# Altium PCB 主控板.PcbDoc
Units mil, origin at the board's own origin, x right, y up, seen from the top; angles counter-clockwise.
Board outline 1975.03 x 2810.37 mil, 2 copper layers (Top Layer, Bottom Layer); 77 components, 89 nets, 379 pads, 104 vias.
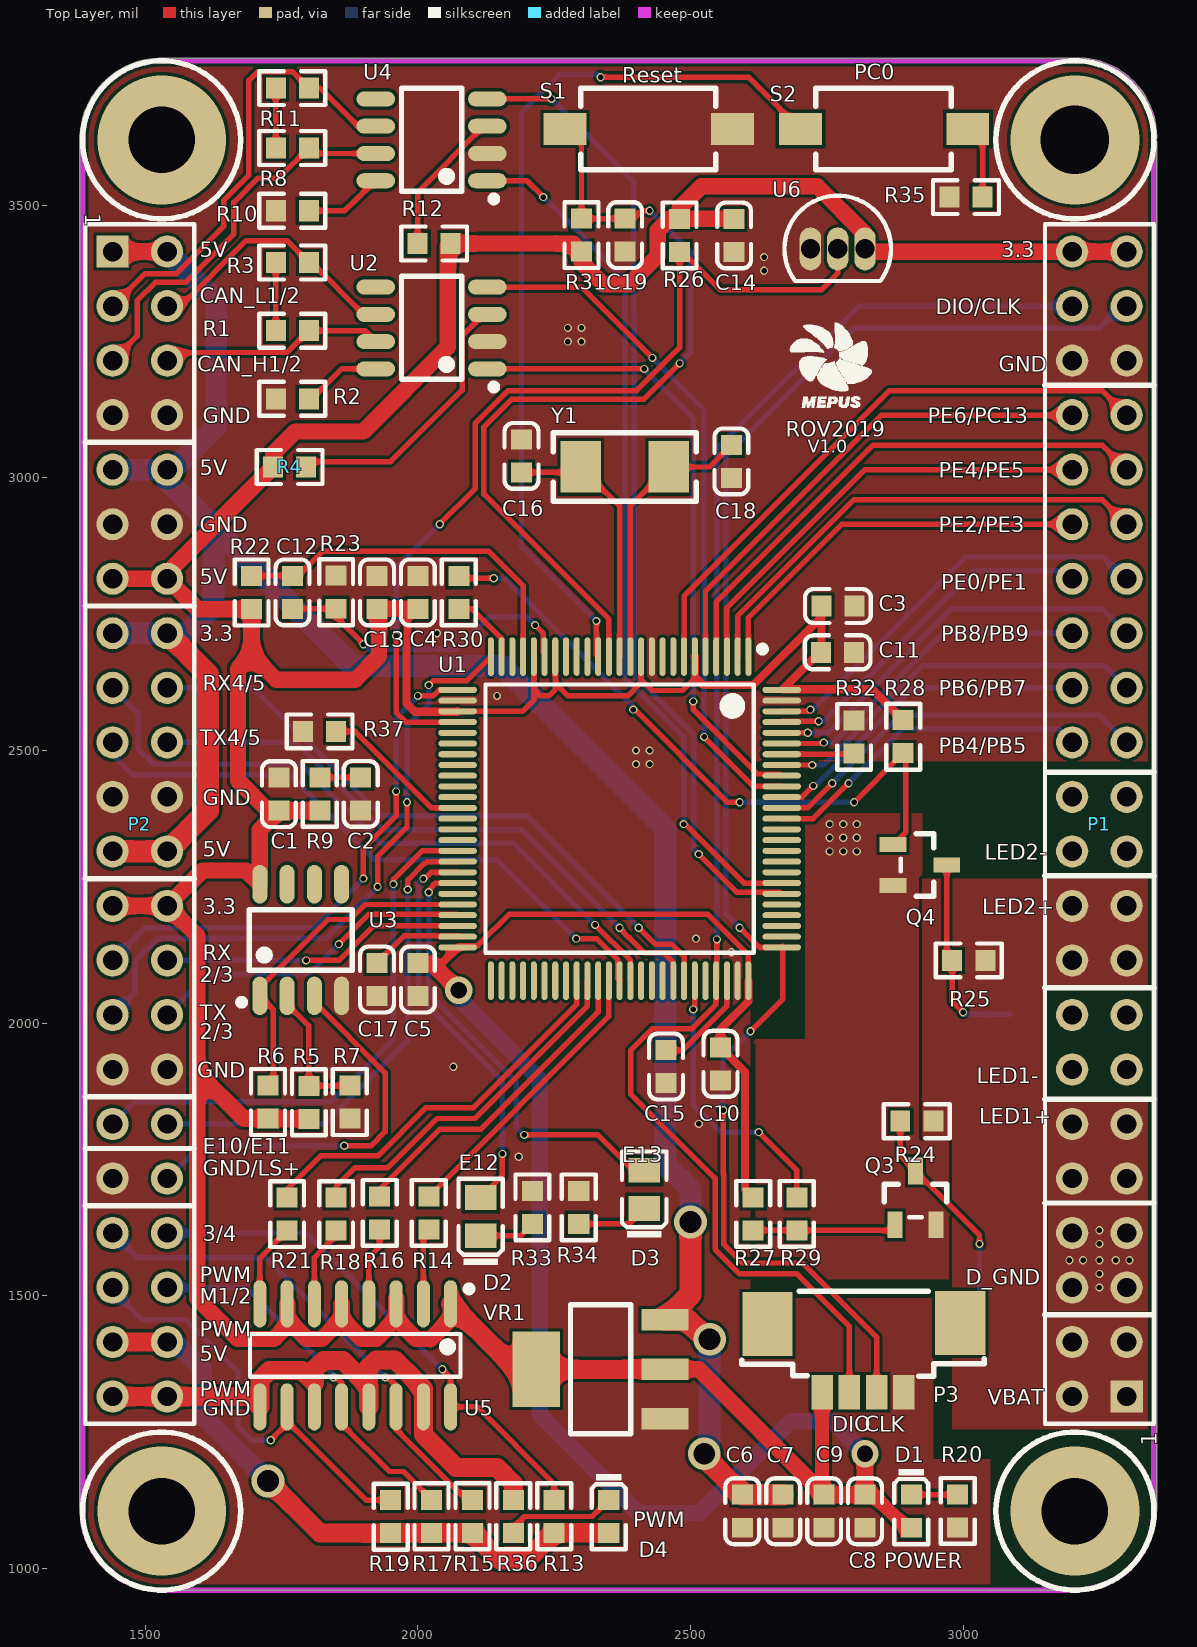
[diagram p0: Top Layer view]
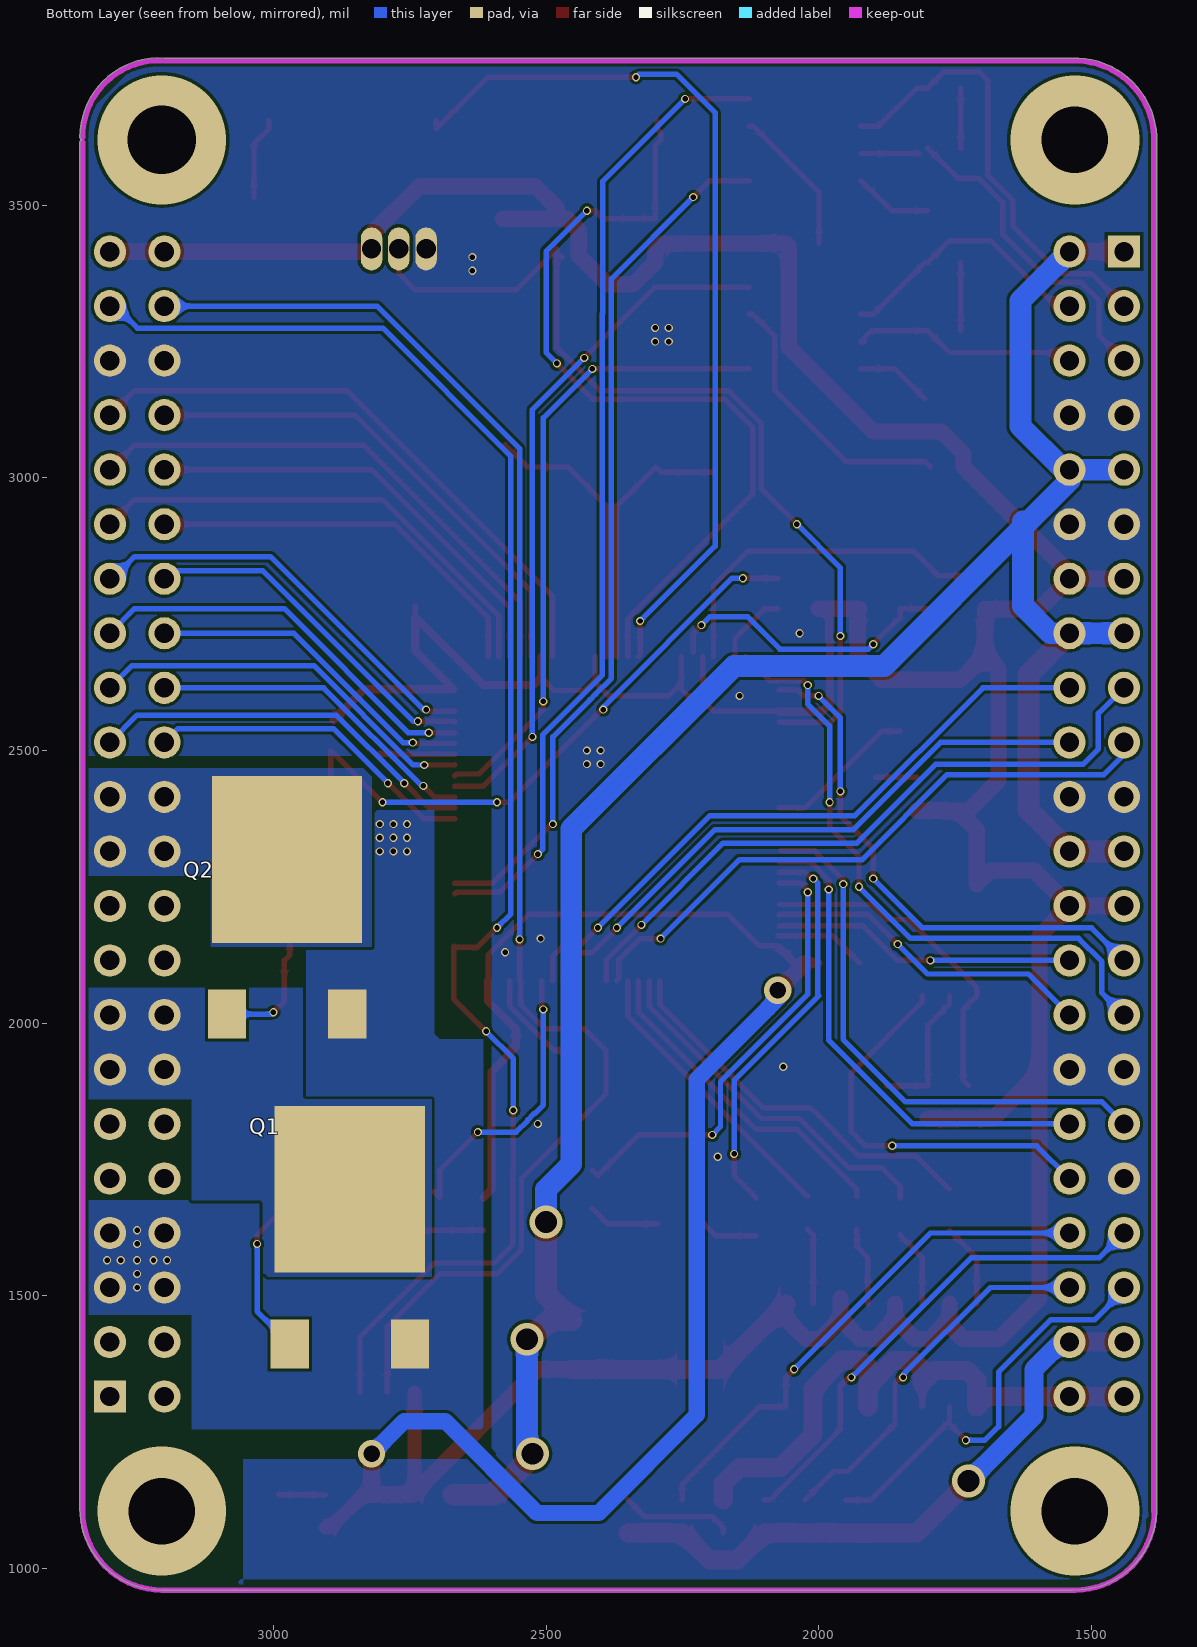
[diagram p1: Bottom Layer view, seen from below]
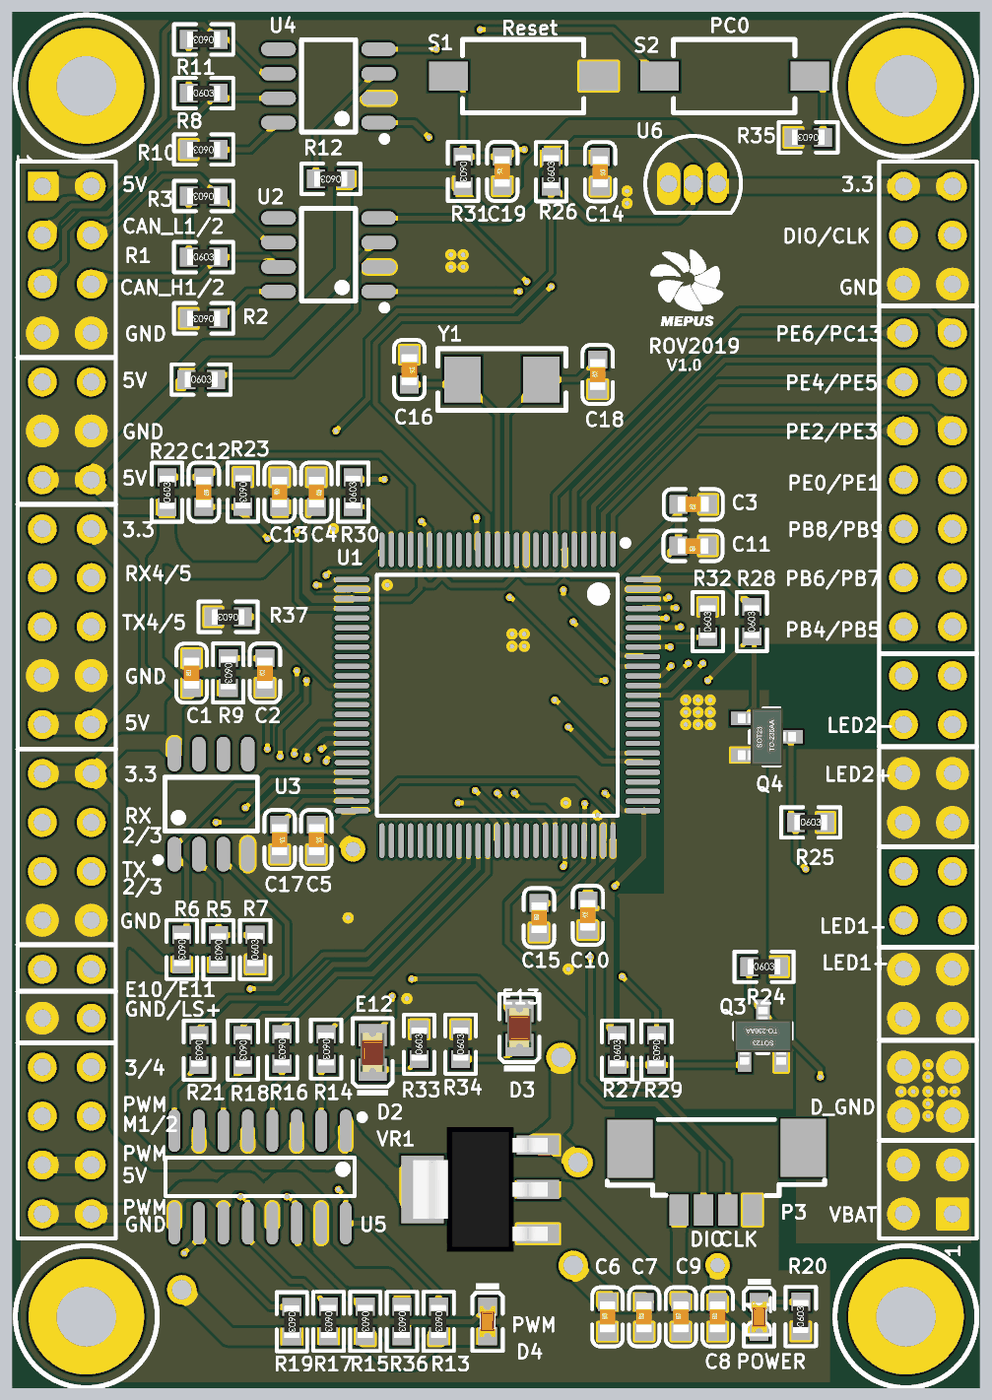
[diagram p2: 3D render of the assembled board from above, using the file's embedded part models]

## Layer stack, top to bottom
Top Solder: solder mask 0.4, Solder Resist, Dk 3.5
Top Layer: signal copper 1.4
Dielectric 1: dielectric 12.6, FR-4, Dk 4.8
Bottom Layer: signal copper 1.4
Bottom Solder: solder mask 0.4, Solder Resist, Dk 3.5

## Board outline
1380.04,1114.23 cw(c1385,1115) 1379.98,1115 1379.98,3625 cw(c1385,3625) 1380.11,3626.11 cw(c1530,3620) 1523.89,3769.89 cw(c1525,3765) 1525,3770.01 3199.47,3770.01 cw(c3209.64,3625) 3355.01,3625 cw(c3350,3625) 3351.57,3620.24 cw(c3350,3615.47) 3355.01,3615.47 3355.01,1110 cw(c3205,1110) 3205,959.99 cw(c3205,1110) 3200.77,960.04 cw(c3200,965) 3200,959.99 1535,959.99 cw(c1535,965) 1534.23,960.04 cw(c1530,1110)

## Design rules (kind name [scope] priority, off if disabled: settings)
Clearance [All] p1: gap=6 ignorepadtopadclearanceinfootprint=FALSE except(0: Arc-Hole Track-Hole SMDPad-Hole THPad-Hole Via-Hole Fill-Hole Poly-Hole Region-Hole Text-Hole)
PolygonConnect [All] p1: connectstyle=Direct reliefconductorwidth=10 reliefentries=2 polygonreliefangle="90 Angle" airgapwidth=10
RoutingVias [All] p1: holewidth=15 width=10 viastyle="Through Hole" minholewidth=15 minwidth=10 maxholewidth=150 maxwidth=100
SilkToSilkClearance [All] p1: silktosilkclearance=6
SilkToSolderMaskClearance [IsPad] p1: minsilkscreentomaskgap=6 clearancetoexposedcopper=TRUE
SolderMaskExpansion [All] p1: expansion=4
Width [InNet('VCC3.3')] p1: maxlimit=200 minlimit=10 preferedwidth=10
28 further rules are at their usual default settings.

## Components (designator, comment, footprint, x,y, rotation, side; value= is the part's Value field where it differs from the comment)
C1 "100nF (104) 10% 50V" 0603_C 1745,2420 r90 top
C2 "100nF (104) 10% 50V" 0603_C 1895,2420.32 r90 top
C3 "100nF (104) 10% 50V" 0603_C 2770.32,2765 r180 top
C4 "100nF (104) 10% 50V" 0603_C 2000,2790 r270 top
C5 "100nF (104) 10% 50V" 0603_C 2000,2080 r270 top
C6 "10uF (106) 10% 10V" 0603_C 2595,1104.68 r90 top
C7 "10uF (106) 10% 10V" 0603_C 2670,1104.68 r90 top
C8 "10uF (106) 10% 10V" 0603_C 2820,1104.68 r90 top
C9 "10uF (106) 10% 10V" 0603_C 2745,1104.68 r90 top
C10 "100nF (104) 10% 50V" 0603_C 2555,1925.32 r90 top
C11 "100nF (104) 10% 50V" 0603_C 2769.68,2680 r180 top
C12 "100nF (104) 10% 50V" 0603_C 1770,2790 r270 top
C13 "100nF (104) 10% 50V" 0603_C 1925,2790 r90 top
C14 "100nF (104) 10% 50V" 0603_C 2580,3444.68 r270 top
C15 "2.2uF (225) 10% 16V" 0603_C 2455,1920.32 r90 top
C16 "22pF (220) 5% 50V" 0603_C 2190,3040.32 r270 top
C17 "2.2uF (225) 10% 16V" 0603_C 1925,2080 r270 top
C18 "22pF (220) 5% 50V" 0603_C 2575,3030.32 r90 top
C19 "100nF (104) 10% 50V" 0603_C 2380,3445.32 r90 top
D1 "红灯 0603" 0603_LED_S1 2905,1104.69 r270 top
D2 "黄灯 0805" 0805_LED_S1 2115,1644.96 r90 top
D3 "蓝灯 0805" 0805_LED_S1 2415,1694.96 r90 top
D4 "白灯 0603" 0603_LED_S1 2350,1095.32 r270 top
P1 "Header 22X2" HDR2X22 3300,1315 r90 top
P2 "Header 22X2" HDR2X22 1440,3415 r270 top
P3 "Header 4" Molex-4 2865.1,1414.53 r0 top
Q1 "NMOS-2" TO-252 2848.19,1734.37 r180 bottom
Q2 "NMOS-2" TO-252 2963.19,2339.37 r180 bottom
Q3 "SS8050 Y1" SOT-23(SOT-23-3) 2912.6,1679.21 r270 top
Q4 "SS8050 Y1" SOT-23(SOT-23-3) 2920.79,2290 r180 top
R1 "0Ω (0R0) ±1%" 0603_R 1769.66,3270 r0 top
R2 "1KΩ (1001) ±1%" 0603_R 1769.66,3145 r180 top
R3 "120Ω (1200) ±1%" 0603_R 1769.66,3395 r180 top
R4 "0Ω (0R0) ±1%" 0603_R 1764.68,3020 r0 top
R5 "10KΩ (1002) ±1%" 0603_R 1800,1854.69 r270 top
R6 "1MΩ (1004) ±1%" 0603_R 1725,1855.32 r270 top
R7 "1KΩ (1001) ±1%" 0603_R 1875,1855.31 r90 top
R8 "0Ω (0R0) ±1%" 0603_R 1769.66,3605 r0 top
R9 "10MΩ (1005) ±1%" 0603_R 1820,2420.32 r270 top
R10 "1KΩ (1001) ±1%" 0603_R 1769.66,3490 r180 top
R11 "120Ω (1200) ±1%" 0603_R 1769.66,3715 r180 top
R12 "0Ω (0R0) ±1%" 0603_R 2029.69,3430 r180 top
R13 "470Ω (4700) ±1%" 0603_R 2250,1095.32 r270 top
R14 "100Ω (1000) ±1%" 0603_R 2020,1651.94 r270 top
R15 "470Ω (4700) ±1%" 0603_R 2100,1095.32 r270 top
R16 "100Ω (1000) ±1%" 0603_R 1929.92,1651.94 r270 top
R17 "470Ω (4700) ±1%" 0603_R 2025,1095.32 r270 top
R18 "100Ω (1000) ±1%" 0603_R 1850,1649.69 r270 top
R19 "470Ω (4700) ±1%" 0603_R 1950,1094.69 r270 top
R20 "1KΩ (1001) ±1%" 0603_R 2990,1105.31 r90 top
R21 "100Ω (1000) ±1%" 0603_R 1760,1649.69 r270 top
R22 "0Ω (0R0) ±1%" 0603_R 1695,2789.68 r90 top
R23 "0Ω (0R0) ±1%" 0603_R 1850,2790.32 r270 top
R24 "4.7KΩ (4701) ±1%" 0603_R 2915,1820 r0 top
R25 "4.7KΩ (4701) ±1%" 0603_R 3010.31,2115 r0 top
R26 "4.7KΩ (4701) ±1%" 0603_R 2480,3444.68 r90 top
R27 "4.7KΩ (4701) ±1%" 0603_R 2615,1650 r90 top
R28 "4.7KΩ (4701) ±1%" 0603_R 2890,2525.31 r90 top
R29 "470Ω (4700) ±1%" 0603_R 2695,1650 r270 top
R30 "470Ω (4700) ±1%" 0603_R 2075,2790 r90 top
R31 "10KΩ (1002) ±1%" 0603_R 2300,3445.32 r270 top
R32 "1KΩ (1001) ±1%" 0603_R 2800,2525 r90 top
R33 "1KΩ (1001) ±1%" 0603_R 2210,1661.94 r90 top
R34 "1KΩ (1001) ±1%" 0603_R 2295,1661.94 r90 top
R35 "1KΩ (1001) ±1%" 0603_R 3005.32,3515 r180 top
R36 "1KΩ (1001) ±1%" 0603_R 2175,1095.32 r270 top
R37 "1KΩ (1001) ±1%" 0603_R 1819.69,2535 r180 top
S1 "SW-PB" 贴片按键 2423.54,3640 r0 top
S2 "SW-PB" 贴片按键 2855,3640 r0 top
U1 "STM32F407VET6" LQFP-100_14x14x05P 2370,2375 r180 top
U2 "CAN/SN65HVD230DR" SOIC-8_150mil 2025,3275 r90 top
U3 "LM393DR2G" SOIC-8_150mil 1785,2152.36 r0 top
U4 "CAN/SN65HVD230DR" SOIC-8_150mil 2025,3620 r90 top
U5 "TLP291-4" LC-SOP-16_150mil 1885,1390.51 r180 top
U6 "DS18B20" TO-92A 2770,3420 r270 top
VR1 "AMS1117-3.3" SOT-223 2335,1365 r0 top
Y1 "8MHz ±20ppm 20pF" SMD-5032_2P 2379.29,3020 r180 top

## Footprints (in the part's own frame and the unit in brackets; to place one, negate y for a bottom-side part, rotate by r counter-clockwise, add the part's x,y. Pads: shape width x height; smd on the part's side, far side on the other; paste and mask are expansions set on the pad)
0603_C [mm]
  rect 0.93x0.98 smd: 1(-0.77,0) 2(0.77,0)
  silkscreen extent -1.53,-0.79 1.54,0.79, body extent -0.8,-0.4 0.8,0.4, height 0.3
0603_LED_S1 [mm]
  rect 0.93x0.98 smd: A(0.77,0) K(-0.77,0)
  silkscreen extent -1.97,-0.79 1.54,0.79, body extent -0.8,-0.4 0.8,0.4, height 0.6
0603_R [mm]
  rect 0.93x0.98 smd: 1(-0.77,0) 2(0.77,0)
  silkscreen extent -1.53,-0.79 1.54,0.79, body extent -0.85,-0.4 0.85,0.4, height 0.56
0805_LED_S1 [mm]
  rect 1.16x1.47 smd: A(0.89,0) K(-0.89,0)
  silkscreen extent -2.24,-1.04 1.77,1.03, body extent -1.01,-0.62 1.01,0.62, height 1.1
HDR2X22 [mm] "Connector; Header; 22x2 Position"
  rect 1.5x1.5 hole 0.9: 1(0,0)
  round 1.5 hole 0.9: 2(0,2.54) 3(2.54,0) 4(2.54,2.54) 5(5.08,0) 6(5.08,2.54) 7(7.62,0) 8(7.62,2.54) 9(10.16,0) 10(10.16,2.54) 11(12.7,0) 12(12.7,2.54) 13(15.24,0) 14(15.24,2.54) 15(17.78,0) 16(17.78,2.54) 17(20.32,0) 18(20.32,2.54) 19(22.86,0) 20(22.86,2.54) 21(25.4,0) 22(25.4,2.54) 23(27.94,0) 24(27.94,2.54) 25(30.48,0) 26(30.48,2.54) 27(33.02,0) 28(33.02,2.54) 29(35.56,0) 30(35.56,2.54) 31(38.1,0) 32(38.1,2.54) 33(40.64,0) 34(40.64,2.54) 35(43.18,0) 36(43.18,2.54) 37(45.72,0) 38(45.72,2.54) 39(48.26,0) 40(48.26,2.54) 41(50.8,0) 42(50.8,2.54) 43(53.34,0) 44(53.34,2.54)
  silkscreen extent -1.27,-1.27 54.61,3.81
LC-SOP-16_150mil [mm]
  oval 0.6x2.2 smd: 1(-4.445,-2.4) 2(-3.175,-2.4) 3(-1.905,-2.4) 4(-0.635,-2.4) 5(0.635,-2.4) 6(1.905,-2.4) 7(3.175,-2.4) 8(4.445,-2.4) 9(4.445,2.4) 10(3.175,2.4) 11(1.905,2.4) 12(0.635,2.4) 13(-0.635,2.4) 14(-1.905,2.4) 15(-3.175,2.4) 16(-4.445,2.4)
  silkscreen extent -5.45,-3.25 4.9,1
LQFP-100_14x14x05P [mm]
  oval 0.28x1.8 smd mask+0.051: 1(-6,-7.55) 2(-5.5,-7.55) 3(-5,-7.55) 4(-4.5,-7.55) 5(-4,-7.55) 6(-3.5,-7.55) 7(-3,-7.55) 8(-2.5,-7.55) 9(-2,-7.55) 10(-1.5,-7.55) 11(-1,-7.55) 12(-0.5,-7.55) 13(0,-7.55) 14(0.5,-7.55) 15(1,-7.55) 16(1.5,-7.55) 17(2,-7.55) 18(2.5,-7.55) 19(3,-7.55) 20(3.5,-7.55) 21(4,-7.55) 22(4.5,-7.55) 23(5,-7.55) 24(5.5,-7.55) 25(6,-7.55) 51(6,7.55) 52(5.5,7.55) 53(5,7.55) 54(4.5,7.55) 55(4,7.55) 56(3.5,7.55) 57(3,7.55) 58(2.5,7.55) 59(2,7.55) 60(1.5,7.55) 61(1,7.55) 62(0.5,7.55) 63(0,7.55) 64(-0.5,7.55) 65(-1,7.55) 66(-1.5,7.55) 67(-2,7.55) 68(-2.5,7.55) 69(-3,7.55) 70(-3.5,7.55) 71(-4,7.55) 72(-4.5,7.55) 73(-5,7.55) 74(-5.5,7.55) 75(-6,7.55)
  oval 1.8x0.28 smd mask+0.051: 26(7.55,-6) 27(7.55,-5.5) 28(7.55,-5) 29(7.55,-4.5) 30(7.55,-4) 31(7.55,-3.5) 32(7.55,-3) 33(7.55,-2.5) 34(7.55,-2) 35(7.55,-1.5) 36(7.55,-1) 37(7.55,-0.5) 38(7.55,0) 39(7.55,0.5) 40(7.55,1) 41(7.55,1.5) 42(7.55,2) 43(7.55,2.5) 44(7.55,3) 45(7.55,3.5) 46(7.55,4) 47(7.55,4.5) 48(7.55,5) 49(7.55,5.5) 50(7.55,6) 76(-7.55,6) 77(-7.55,5.5) 78(-7.55,5) 79(-7.55,4.5) 80(-7.55,4) 81(-7.55,3.5) 82(-7.55,3) 83(-7.55,2.5) 84(-7.55,2) 85(-7.55,1.5) 86(-7.55,1) 87(-7.55,0.5) 88(-7.55,0) 89(-7.55,-0.5) 90(-7.55,-1) 91(-7.55,-1.5) 92(-7.55,-2) 93(-7.55,-2.5) 94(-7.55,-3) 95(-7.55,-3.5) 96(-7.55,-4) 97(-7.55,-4.5) 98(-7.55,-5) 99(-7.55,-5.5) 100(-7.55,-6)
  silkscreen extent -6.8,-8.05 6.25,6.25
Molex-4 [mm]
  rect 2.35x3 smd: 0(-5.687,0.852) 0(3.3,0.901)
  rect 1x1.6 smd: 1(-3.147,-2.323) 2(-1.877,-2.323) 3(-0.607,-2.323) 4(0.663,-2.323)
  silkscreen extent -6.88,-1.58 4.41,2.38
SMD-5032_2P [mm]
  rect 1.9x2.4 smd: 1(-2.05,0) 2(2.05,0)
  silkscreen extent -3.32,-1.6 3.32,1.6
SOIC-8_150mil [mm]
  oval 0.7x1.8 smd: 1(-1.905,-2.6) 2(-0.635,-2.6) 3(0.635,-2.6) 4(1.905,-2.6) 5(1.905,2.6) 6(0.635,2.6) 7(-0.635,2.6) 8(-1.905,2.6)
  silkscreen extent -2.9,-3.05 2.4,1.4
SOT-23(SOT-23-3) [mm]
  rect 1.25x0.7 smd: 1(1.25,-0.95) 2(1.25,0.95) 3(-1.25,0)
  silkscreen extent -0.65,-1.46 0.9,1.46, body extent -1.5,-1.5 1.5,1.5, height 1.3
SOT-223 [mm]
  rect 2.2x1 smd: 1(3,-2.3) 2(3,0) 3(3,2.3)
  rect 2.2x3.5 smd: 2(-3,0)
  silkscreen extent -1.4,-3 1.4,3, body extent -3.49,-3.24 3.49,3.24, height 1.64
TO-92A [mm]
  oval 2x1 hole 0.9: 1(0,-1.27) 2(0,0) 3(0,1.27)
  silkscreen extent -2.48,-2.48 1.5,2.48
TO-252 [mm]
  rect 1.778x2.286 smd: 1(-3.1,-8.2) 3(2.5,-8.2)
  rect 7x7.762 smd: 2(-0.3,-1)
贴片按键 [mm]
  rect 2x1.5 smd: 1(-3.9,0) 2(3.9,0)
  silkscreen extent -3.17,-1.9 3.13,1.9, body extent -3.96,-1.94 3.93,1.91, height 2.5

## Part data
C1 C2 C3 C4 C5 C10 C11 C12 C13 C14 C19: library part "0603 100nF (104) 10% 50V", "贴片电容"
C6 C7 C8 C9: library part "0603 10uF (106) 10% 10V", "贴片电容"
C15 C17: library part "0603 2.2uF (225) 10% 16V", "贴片电容"
C16 C18: library part "0603 22pF (220) 5% 50V", "贴片电容"
D1: library part "0603 红灯", "发光二极管"
D2: library part "0805 黄灯", "发光二极管"
D3: library part "0805 蓝灯", "发光二极管"
D4: library part "0603 白灯", "发光二极管"
P1 P2: "Header, 22-Pin, Dual row"
P3: library part "Header 4_1", "Header, 4-Pin"
Q1 Q2: "N-Channel Power MOSFET"
Q3 Q4: library part "SOT-23 SS8050 Y1", "三极管"
R1 R4 R8 R12 R22 R23: library part "0603 0Ω (0R0) 1%", "贴片电阻"
R2 R7 R10 R20 R32 R33 R34 R35 R36 R37: library part "0603 1KΩ (1001) 1%", "贴片电阻"
R3 R11: library part "0603 120Ω (1200) 1%", "贴片电阻"
R5 R31: library part "0603 10KΩ (1002) 1%", "贴片电阻"
R6: library part "0603 1MΩ (1004) 1%", "贴片电阻"
R9: library part "0603 10MΩ (1005) 1%", "贴片电阻"
R13 R15 R17 R19 R29 R30: library part "0603 470Ω (4700) 1%", "贴片电阻"
R14 R16 R18 R21: library part "0603 100Ω (1000) 1%", "贴片电阻"
R24 R25 R26 R27 R28: library part "0603 4.7KΩ (4701) 1%", "贴片电阻"
S1 S2: "Switch"
U1: "ARM"
U2 U4: library part CAN/SN65HVD230DR_[C12084], "CAN"
U3: library part LM393DR2G_[C7955], "电压比较器"
U5: library part TLP521-4
VR1: library part "SOT-223 AMS1117-3.3", "低压差线性稳压(LDO)"
Y1: library part "SMD-5032_2P 8MHz 20ppm 20pF", "贴片晶振"

## Via types
v1: diameter 15, hole 10, Top Layer to Bottom Layer, 94 vias
v2: diameter 60, hole 40, Top Layer to Bottom Layer, 4 vias
v3: diameter 236.22, hole 122.05, Top Layer to Bottom Layer, 3 vias
v4: diameter 50, hole 30, Top Layer to Bottom Layer, 2 vias
v5: diameter 236.22, hole 125.98, Top Layer to Bottom Layer, 1 vias

## Nets (pads, with @x,y where several pads share a name; then routed paths per layer and width w, separated by ;. In a path a pad name is that pad's centre, name@x,y a point inside that pad or via, vN(x,y) a via of type N, cw(c..) or ccw(c..) an arc to the next point about the centre after c; other vN are vias at no path point)
BOOT1: R37.1 U1.37 | length 280.9
  Top Layer w10: R37.1 1885,2535 2025.32,2394.68 U1.37
CAN1_RX: U1.81 U4.4 | length 1796.9
  Top Layer w10: U4.4 v1(2245,3695) ; v1(2515,2310) 2584.62,2240.38 2664.07,2240.38 U1.81
  Bottom Layer w10: v1(2245,3695) 2396,3544 2396,3302 2396.5,3301.5 2396.5,2638.5 2415.5,2619.5 ; 2415.54,2619.5 2505.87,2529.17 2505.87,2319.13 v1(2515,2310)
CAN1_TX: U1.82 U4.1 | length 1596.3
  Top Layer w10: U4.1 2200,3545 v1(2230,3515) ; v1(2487.37,2365) 2490,2365 2598.11,2256.89 U1.82
  Bottom Layer w10: v1(2230,3515) 2380,3365 2380,2632.37 2408.87,2603.5 ; 2408.91,2603.5 2419.75,2592.66 ; 2419.75,2592.62 2487.37,2525 v1(2487.37,2365)
CAN2_RX: U1.91 U2.4 | length 1270.8
  Top Layer w10: U2.4 2300,3350 v1(2430,3220) ; v1(2525,2525) 2615.94,2434.06 U1.91
  Bottom Layer w10: v1(2430,3220) 2525,3125 v1(2525,2525)
CAN2_TX: U1.92 U2.1 | length 1162.4
  Top Layer w10: U2.1 v1(2415,3200) ; v1(2505,2590) 2505,2575 2623.09,2456.91 2664.07,2456.91 U1.92
  Bottom Layer w10: v1(2415,3200) 2505,3110 v1(2505,2590)
CAN_H1: P2.5 R8.2 U4.7 | length 700.8
  Top Layer w10: P2.5 1485,3260 1485,3325 1518.47,3358.47 1573.47,3358.47 1662.47,3447.47 1662.47,3505.25 1706.9,3549.68 1744.66,3549.68 R8.2 ; R8.2@1815.32,3595 U4.7
CAN_H2: P2.6 R1.2 U2.7 | length 420.4
  Top Layer w10: P2.6 1555,3230 1759.98,3230 R1.2 1902.64,3270 U2.7 U2.7@1915.94,3250
CAN_L1: P2.3 R11.1 U4.6 | length 832.1
  Top Layer w10: P2.3 1499.47,3374.47 1556.79,3374.47 1643.66,3461.34 1643.66,3509.07 1690,3555.41 1690,3729 1706.29,3745.29 1769.68,3745.29 R11.1 1820,3715 1890,3645 U4.6
CAN_L2: P2.4 R3.1 U2.6 | length 482.9
  Top Layer w10: P2.4 1565,3315 1685,3435 1759.98,3435 R3.1 ; R3.1@1805.31,3395 1900.31,3300 U2.6
D_GND: P1.5 P1.6 P1.7 P1.8 Q1.3 Q2.3 Q3.2 Q4.2
  other v1: 3250,1515 3250,1540 3195,1565 3220,1565 3250,1565 3280,1565 3305,1565 3250,1595 3250,1620 2755,2315 2780,2315 2805,2315 2755,2340 2780,2340 2805,2340 2755,2365 2780,2365 2805,2365
E10: P2.33 U1.41 | length 1009.4
  Top Layer w10: v1(1955,2255) 1955,2263.5 2007.44,2315.94 U1.41@2070,2315.94
  Bottom Layer w10: P2.33 1480.53,1855.53 1840.53,1855.53 1955,1970 v1(1955,2255)
E11: P2.34 U1.42 | length 904.2
  Top Layer w10: v1(1981.5,2245) 1981.5,2262.66 2012.34,2293.5 2013.5,2293.5 2016.26,2296.26 U1.42
  Bottom Layer w10: P2.34 1827.63,1815 1981.5,1968.87 v1(1981.5,2245)
E12: D2.A U1.43 | length 741.2
  Top Layer w10: v1(2010,2265) 2010,2262.37 2024.2,2276.57 U1.43 ; D2.A 2155,1720 v1(2155,1760)
  Bottom Layer w10: v1(2010,2265) 2001.5,2256.5 2001.5,2051.5 2000,2050 2155,1895 v1(2155,1760)
E13: D3.A U1.44 | length 835.4
  Top Layer w10: v1(2020,2240) 2020,2243.84 2028.5,2252.34 2028.5,2253.5 2031.89,2256.89 U1.44 ; v1(2195,1795) 2330,1795 2405,1720 D3.A
  Bottom Layer w10: v1(2020,2240) 2020,2052.63 2180,1892.63 2180,1810 v1(2195,1795)
GND: C1.2 C2.1 C3.1 C4.1 C5.2 C6.1 C7.1 C8.1 C9.1 C10.1 C11.1 C13.2 C14.2 C15.1 C16.1 C17.2 C18.1 C19.1 P1.39 P1.40 P2.7 P2.8 P2.11 P2.12 P2.21 P2.22 P2.31 P2.32 P2.35 P3.4 R2.2 R7.1 R10.2 R20.1 R23.1 R32.2 R33.2 R34.2 R35.2 R37.2 S1.2 U1.10 U1.27 U1.74 U1.99 U2.2 U3.4 U4.2 U6.1 VR1.1
  other v1: 2185,1755 2515,1815 2065,1920 2575,2130 2510,2155 2400,2475 2425,2475 2400,2500 2425,2500 2145,2600 2035,2715 2275,3250 2300,3250 2275,3275 2300,3275 2635,3380 2635,3405
LS+: P2.36 U3.3 | length 738.4
  Top Layer w10: U3.3 1810,2038.84 1940,1908.84 1940,1801 1914,1775 v1(1865,1775)
  Bottom Layer w10: P2.36 1600,1775 v1(1865,1775)
NetC2_2: C2.2 R9.1 | length 75
  Top Layer w10: R9.1 C2.2
NetC12_1: C12.1 R22.2 U1.22 | length 672.7
  Top Layer w10: R22.2@1695,2820.63 1780.63,2820.63 1825.63,2865.63 2129.37,2865.63 2192.83,2802.17 U1.22
NetC12_2: C12.2 R23.2 U1.20 | length 566.3
  Top Layer w10: C12.2@1775,2760 R23.2 1850,2745 v1(1900,2695) ; v1(2215,2730) 2230,2715 U1.20@2230,2680.04
  Bottom Layer w10: v1(1900,2695) 1909,2686 2071,2686 2130,2745 2200,2745 v1(2215,2730)
NetC15_2: C15.2 U1.73 | length 192.3
  Top Layer w10: C15.2 2455.63,1950 2485.65,1950 2566.85,2031.2 U1.73
NetC16_2: C16.2 U1.13 Y1.2 | length 490.1
  Top Layer w10: C16.2 2288.58,3010 Y1.2 2370,2948.58 U1.13
NetC17_1: C17.1 U1.49 | length 170.7
  Top Layer w10: C17.1 1975.04,2160.35 U1.49@2075,2160.35
NetC18_2: C18.2 U1.12 Y1.1 | length 508.7
  Top Layer w10: U1.12 2389.68,2949.68 Y1.1 2534.37,3020 C18.2
NetC19_2: C19.2 R31.1 S1.1 U1.14 | length 1559.9
  Top Layer w10: S1.1@2296.46,3655 2296.46,3640 2290,3633.54 2290,3620 2300,3610 R31.1 C19.2 2395.63,3475.63 2410,3490 v1(2425,3490) ; U1.14 2350.32,2740.85 2121,2970.16 2121,3093.37 2171.63,3144 2414,3144 v1(2480,3210)
  Bottom Layer w10: v1(2425,3490) 2500,3415 2500,3230 v1(2480,3210)
NetD1_K: D1.K R20.2 | length 85.3
  Top Layer w10: D1.K 2989.37,1135 R20.2
NetD2_K: D2.K R33.1 | length 104
  Top Layer w10: D2.K 2188.29,1609.92 R33.1
NetD3_K: D3.K R34.1 | length 131.7
  Top Layer w10: R34.1 2386.71,1631.63 D3.K
NetD4_K: D4.K R36.2 | length 206
  Top Layer w10: R36.2 2175,1075 2195,1095 2319.37,1095 D4.K
NetQ1_1: Q1.1 Q3.3 R24.1 | length 493.4
  Top Layer w10: R24.1 2884.69,1756.34 Q3.3 3030,1611.02 v1(3030,1595)
  Bottom Layer w10: Q1.1 3030,1471.3 v1(3030,1595)
NetQ2_1: Q2.1 Q4.3 R25.1 | length 369.1
  Top Layer w10: Q4.3 2970,2125 R25.1 2980,2040 v1(3000,2020)
  Bottom Layer w10: v1(3000,2020) 3003.46,2016.54 Q2.1
NetQ3_1: Q3.1 R27.1 R29.2 | length 265.2
  Top Layer w10: R27.1@2615,1620 2695.32,1620 R29.2 2864.88,1619.68 Q3.1
NetQ4_1: Q4.1 R28.1 R30.2 | length 1218.4
  Top Layer w10: R30.2@2075,2816 v1(2139,2816) ; v1(2395,2575) 2395,2577.5 2567.5,2405 v1(2590,2405) ; v1(2800,2405) R28.1 2895,2500 2895,2350.83 Q4.1
  Bottom Layer w10: v1(2139,2816) 2159,2816 2395,2580 v1(2395,2575) ; v1(2590,2405) v1(2800,2405)
NetR1_1: R1.1 R3.2 | length 125
  Top Layer w10: R1.1 R3.2
NetR2_1: R2.1 U2.8 | length 140.4
  Top Layer w10: R2.1@1805,3145 1860,3200 U2.8
NetR4_2: R4.2 U2.3 | length 506.5
  Top Layer w10: R4.2 1805,3030 1950,3030 2080.93,3160.93 2080.93,3260.26 2120.67,3300 U2.3
NetR5_1: R5.1 R7.2 U3.2 | length 256.8
  Top Layer w10: U3.2 1760,2035 1800,1995 R5.1 1874.37,1885 R7.2
NetR8_1: R8.1 R11.2 | length 110
  Top Layer w10: R8.1 R11.2
NetR10_1: R10.1 U4.8 | length 144
  Top Layer w10: R10.1@1800.63,3490 1865,3490 U4.8
NetR12_2: R12.2 U4.3 | length 271.9
  Top Layer w10: R12.2 1999.37,3523.7 2120.67,3645 U4.3
NetR14_2: R14.2 U5.2 | length 140.8
  Top Layer w10: U5.2 2010,1611.63 R14.2
NetR16_2: R16.2 U5.4 | length 144.9
  Top Layer w10: U5.4 1910,1570 1929.92,1589.92 R16.2
NetR18_2: R18.2 U5.6 | length 143
  Top Layer w10: U5.6 1810,1570 1850,1610 R18.2@1850,1611.47
NetR21_2: R21.2 U5.8 | length 155.1
  Top Layer w10: U5.8 1710,1569.37 R21.2
NetR32_1: R32.1 U1.94 | length 138.5
  Top Layer w10: U1.94 2667.63,2493.5 2803.5,2493.5 R32.1@2805,2495
NetR35_1: R35.1 S2.2 | length 151.2
  Top Layer w10: S2.2@3008.54,3655 S2.2 3035.63,3612.91 R35.1
PB3: P1.25 U1.89 | length 724
  Top Layer w10: U1.89 2714.68,2394.68 v1(2760,2440)
  Bottom Layer w10: v1(2760,2440) 2885,2565 3250,2565 P1.25
PB4: P1.28 U1.90 | length 630
  Top Layer w10: U1.90 2704.37,2414.37 v1(2725,2435)
  Bottom Layer w10: v1(2725,2435) 2727.88,2435 2907.88,2615 P1.28@3195,2615 ; P1.28@3185,2625 P1.28@3195,2615 ; P1.28 P1.28@3195,2615
PB7: P1.27 U1.93 | length 725.1
  Top Layer w10: U1.93@2667.32,2473.5 U1.93 v1(2723.43,2473.43)
  Bottom Layer w10: v1(2723.43,2473.43) 2737.26,2473.43 2737.34,2473.5 2743.75,2473.5 2925.78,2655.53 3259.47,2655.53 P1.27
PB8: P1.30 U1.95 | length 616.5
  Top Layer w10: U1.95 2742.8,2512.8 v1(2744.37,2514.37)
  Bottom Layer w10: v1(2744.37,2514.37) 2762,2514.37 2962.63,2715 P1.30
PB9: P1.29 U1.96 | length 745.6
  Top Layer w10: U1.96 v1(2715,2532.48)
  Bottom Layer w10: v1(2715,2532.48) 2715.39,2532.87 2752.87,2532.87 2980,2760 3255,2760 P1.29
PC0: S2.1 U1.15 | length 1645.8
  Top Layer w10: v1(2327.46,2737.54) 2327.46,2675.42 U1.15 ; v1(2335,3735) 2606.46,3735 S2.1 S2.1@2701.46,3655
  Bottom Layer w10: v1(2327.46,2737.54) 2190,2875 2190,3670 2260,3740 v1@2330,3740
PC13: P1.37 U1.7 | length 1097.5
  Top Layer w10: U1.7 2488.11,2783.11 2865,3160 3255,3160 P1.37
PD7: P1.26 U1.88 | length 611.5
  Top Layer w10: U1.88 2725,2375 v1(2790,2440)
  Bottom Layer w10: v1(2790,2440) 2890,2540 3175,2540 P1.26
PE0: P1.32 U1.97 | length 649.1
  Top Layer w10: U1.97 2668.58,2553.5 v1(2735,2553.5)
  Bottom Layer w10: v1(2735,2553.5) 2743.5,2553.5 3020,2830 3180,2830 P1.32@3195,2815
PE1: P1.31 U1.98 | length 762
  Top Layer w10: U1.98 2716.85,2571.85 v1(2720,2575)
  Bottom Layer w10: v1(2720,2575) 2725,2575 3005.53,2855.53 3254.47,2855.53 P1.31@3295,2815
PE2: P1.34 U1.1 | length 736.1
  Top Layer w10: U1.1 2606.22,2743.59 2777.63,2915 P1.34
PE3: P1.33 U1.2 | length 894.8
  Top Layer w10: U1.2 2586.54,2746.54 2800,2960 3255,2960 P1.33
PE4: P1.36 U1.3 | length 827.6
  Top Layer w10: U1.3 2566.85,2761.85 2820,3015 P1.36
PE5: P1.35 U1.4 | length 990.6
  Top Layer w10: U1.4 2547.17,2772.17 2835,3060 3255,3060 P1.35
PE6: P1.38 U1.5 | length 926.3
  Top Layer w10: U1.5 2527.48,2792.48 2850,3115 P1.38
POWER_LED1_GND: P1.13 P1.14 P1.15 P1.16 Q1.2
POWER_LED1_VCC: P1.1 P1.2 P1.3 P1.4 P1.9 P1.10 P1.11 P1.12 P1.17 P1.18 P1.19 P1.20 R24.2 R25.2 | length 5
  Top Layer w15: P1.18@3195,2115 P1.18
POWER_LED2_GND: P1.21 P1.22 P1.23 P1.24 Q2.2
PWM_5V: D4.A P2.41 P2.42 R13.2 R15.2 R17.2 R19.2 | length 1149.6
  Top Layer w30: R19.2 R19.2@1950.63,1065
  Top Layer w35: P2.41 P2.42 ; v2(1725,1160) 1820.63,1064.37 R19.2 ; R19.2@1950.63,1065 R17.2 R15.2 2150,1015 2200,1015 R13.2 D4.A
  Bottom Layer w10: v2@1722.07,1160 v2(1725,1160)
  Bottom Layer w35: P2.42 1555,1415 1605,1365 1605,1280 v2(1725,1160)
PWM_GND: P2.43 P2.44 R36.1 U5.9 U5.11 U5.13 U5.15 | length 1194.6
  Top Layer w10: U5.11 1810,1340
  Top Layer w35: P2.43 P2.44 1691.02,1315 U5.9 1710,1345 1727.83,1362.83 1787.17,1362.83 1810,1340 1810,1365 1820,1375 1821.16,1375 1827.16,1381 1862.84,1381 U5.13@1909,1334.84 ; R36.1 2175,1155 2145,1185 2070.3,1185 2010,1245.31 U5.15 2010,1330 1957.81,1382.19 1923.35,1382.19 1910.16,1369 1909,1369 U5.13@1909,1334.84 ; U5.13@1909,1334.84 1909,1297.02 U5.13 1910,1333.84 U5.13@1909,1334.84
PWM_M1: P2.39 R19.1 U5.10 | length 791
  Top Layer w10: v1(1730,1235) 1760,1265 U5.10@1760,1270 ; U5.10 U5.10@1760,1270 ; R19.1 1905,1125 U5.10@1760,1270
  Bottom Layer w10: P2.39 1440,1510 1494.47,1455.53 1574.47,1455.53 1670,1360 1670,1260 1695,1235 v1(1730,1235)
PWM_M2: P2.40 R17.1 U5.12 | length 693.1
  Top Layer w10: v1(1845,1350) 1850,1350 1860,1340 U5.12 1860,1265 1947.5,1177.5 1973.13,1177.5 R17.1
  Bottom Layer w10: P2.40 1685,1515 1845,1355 v1(1845,1350)
PWM_M3: P2.37 R15.1 U5.14 | length 909.6
  Top Layer w10: v1(1940,1350) 1945,1350 1960,1335 U5.14 1960,1255 2089.37,1125.63 R15.1
  Bottom Layer w10: P2.37 1485,1570 1720,1570 v1(1940,1350)
PWM_M4: P2.38 R13.1 U5.16 | length 961.5
  Top Layer w10: v1(2045,1365) 2060,1350 U5.16 2108.98,1296.02 2250,1155 R13.1
  Bottom Layer w10: P2.38 1795,1615 v1(2045,1365)
RX1: P2.18 U1.69 | length 1196.5
  Top Layer w10: v1(2405,2175) 2435,2145 2465,2145 2488.11,2121.89 U1.69
  Bottom Layer w10: P2.18 1698.84,2615 1933.84,2380 2200,2380 v1(2405,2175)
RX2: P2.27 U1.26 | length 976
  Top Layer w10: v1(1900,2265) 1900,2320 1960,2380 v1(1960,2425) ; v1(2000,2600) 2027.95,2600 2039.17,2611.22 U1.26
  Bottom Layer w10: P2.27 1499.47,2174.47 1809.47,2174.47 v1(1900,2265) ; v1(1960,2425) 1960,2560 v1(2000,2600)
RX3: P2.28 U1.48 | length 573.9
  Top Layer w10: v1(1795,2115) 1855.25,2115 1918.4,2178.15 U1.48
  Bottom Layer w10: P2.28@1540,2100 P2.28 v1(1795,2115)
RX6: P2.17 U1.64 | length 1232.3
  Top Layer w10: v1(2325,2180) 2389.68,2115.32 U1.64
  Bottom Layer w10: P2.17 1486.97,2568.03 1486.97,2503.03 1515.53,2474.47 1785.53,2474.47 1930,2330 2175,2330 v1(2325,2180)
SENSOR_LED1: R29.1 U1.70 | length 533.1
  Top Layer w10: v1(2505,2025) 2507.8,2027.8 U1.70 ; v1(2625,1800) 2695,1730 R29.1 R29.1@2705,1690.31
  Bottom Layer w10: v1(2505,2025) 2505,1850 2521.5,1833.5 2522.66,1833.5 2533.5,1822.66 2533.5,1821.5 2555,1800 v1(2625,1800)
SENSOR_LED2: R30.1 U1.24 | length 134.4
  Top Layer w10: R30.1 2099.61,2759.69 2153.46,2705.83 U1.24
SWCLK: P1.41 P3.3 U1.76 | length 2860.8
  Top Layer w10: v1(2560,1840) 2560,1722.63 2561,1721.63 2561,1594 2595,1560 2705,1560 2841.2,1423.8 P3.3 ; v1(2590,2175) 2626.22,2138.78 U1.76 ; v1(2610,1985) 2669.49,2044.49 U1.76@2669.49,2140.67
  Bottom Layer w10: v1(2560,1840) 2560,1935 v1(2610,1985) ; v1(2590,2175) 2564.5,2200.5 2564.5,3039.5 2799.47,3274.47 3249.47,3274.47 3290,3315 P1.41
SWDIO: P1.42 P3.2 U1.72 | length 2824.7
  Top Layer w10: U1.72@2546.24,2076.47 2546.24,2033.21 2503.02,1990 2430,1990 2390,1950 2390,1870 2545,1715 2545,1585 2590,1540 2695,1540 2791.2,1443.8 P3.2 ; U1.72 2548.5,2079.09 v1(2548.5,2153.5)
  Bottom Layer w10: v1(2548.5,2153.5) 2548.5,3053.5 2810,3315 P1.42
TEMP: R26.1 U1.29 U6.2 | length 1710.9
  Top Layer w10: v1(1960,2710) 1960,2570 1977.83,2552.17 U1.29 ; v1(2040,2915) 2105,2980 2105,3100 2165,3160 2401.16,3160 2480,3238.84 R26.1 R26.1@2470,3404.37 ; R26.1@2480,3420 2555,3345 2740,3345 2770,3375 U6.2
  Bottom Layer w10: v1(1960,2710) 1960,2835 v1(2040,2915)
TIM4_CH1: R21.1 U1.59 | length 714.7
  Top Layer w10: R21.1@1760,1696 1761,1696 1821.5,1756.5 1926.5,1756.5 2015,1845 2101.76,1845 2291.26,2034.5 U1.59
TIM4_CH2: R18.1 U1.60 | length 664.5
  Top Layer w10: R18.1 1850,1700 1885,1735 1945,1735 2035,1825 2104.39,1825 2310.94,2031.55 U1.60
TIM4_CH3: R16.1 U1.61 | length 605.4
  Top Layer w10: R16.1 1929.92,1694.92 2040,1805 2115,1805 2330.63,2020.63 U1.61
TIM4_CH4: R14.1 U1.62 | length 532.3
  Top Layer w10: R14.1 2350.32,2012.57 U1.62
TX1: P2.20 U1.68 | length 1129.9
  Top Layer w10: v1(2370,2175) 2376.5,2168.5 2376.5,2167.34 2387.34,2156.5 2388.5,2156.5 2416,2129 2450.77,2129 2468.43,2111.34 U1.68
  Bottom Layer w10: P2.20 1776.21,2515 1936.21,2355 2190,2355 v1(2370,2175)
TX2: P2.29 U1.25 | length 1161.3
  Top Layer w10: v1(1926,2250) 1926,2306 1980,2360 v1(1980,2405) ; v1(2020,2620) 2027.73,2627.73 2089.27,2627.73 U1.25
  Bottom Layer w10: P2.29 1480.56,2055.56 1480.56,2112.87 1523.21,2155.53 1831.53,2155.53 v1(1926,2250) ; v1(1980,2405) 1980,2545 2020,2585 v1(2020,2620)
TX3: P2.30 U1.47 | length 610.3
  Top Layer w10: v1(1855,2145) 1910,2200 2070.59,2200 U1.47
  Bottom Layer w10: P2.30 1615,2090 1800,2090 v1(1855,2145)
TX6: P2.19 U1.63 | length 1138
  Top Layer w10: v1(2290,2155) 2327.37,2155 2366.83,2115.55 2366.83,2080.93 U1.63
  Bottom Layer w10: P2.19@1428.69,2503.69 1476.85,2455.53 1764.47,2455.53 1920,2300 2145,2300 v1(2290,2155)
VCC3.3: C1.1 C3.2 C4.2 C5.1 C8.2 C9.2 C10.2 C11.2 C13.1 C14.1 D1.A P1.43 P1.44 P2.13 P2.14 P2.25 P2.26 P3.1 R4.1 R5.2 R6.2 R9.2 R12.1 R22.1 R26.2 R27.2 R28.2 R31.2 U1.6 U1.11 U1.19 U1.21 U1.28 U1.50 U1.75 U1.100 U3.8 U5.1 U5.3 U5.5 U5.7 U6.3 VR1.2 | length 11728.9
  Top Layer w10: U1.50 2075.93,2141.95 2109.52,2141.95 2167.56,2200 2531.16,2200 2606.22,2124.94 U1.75 ; U1.28 2191.85,2571.85 2212.52,2592.52 2212.52,2612.48 ; U1.21 2212.52,2612.48 ; U1.19 2251.89,2623.11 ; U1.11 2409.37,2630.63 ; U1.6 2507.8,2632.8 2485,2610 2430,2610 2409.37,2630.63 ; C11.2 2740,2680.63 C11.2@2740,2683.62 ; 2740,2745 C3.2 ; U6.3@2820,3447.22 U6.3 U6.3@2825,3415 ; 2832.56,2612.44 2833.19,2612.44 ; 2212.52,2612.48 2225,2600 2240,2600 2251.89,2611.89 2251.89,2623.11 ; 2251.89,2623.11 2275,2600 2385,2600 2409.37,2624.37 2409.37,2630.63
  Top Layer w15: C5.1 2024.68,2110.32 2044.29,2110.32 U1.50 ; C4.2 1981,2740.68 1981,2701.3 1979,2699.3 1979,2586 1993.82,2571.18 2072.08,2571.18 U1.28 ; U1.6 2508.47,2671.57 2508.47,2634.45 2522.92,2620 2615,2620 2740,2745 2740,2683.62 2669.49,2613.11 2670.16,2612.44 2832.56,2612.44 ; C10.2 2600,1910.63 2600,1695 R27.2@2615,1680 ; C10.2@2565,1950.63 2555,1960.63 2555,1988.84 2606.22,2040.06 U1.75 ; C9.2@2741.2,1138.8 C9.2 ; 2833.19,2612.44 R28.2
  Top Layer w25: C9.2@2741.2,1138.8 P3.1 ; C8.2 2835,1135 2895.63,1074.37 D1.A
  Top Layer w30: P2.25 P2.26 ; P2.13 P2.14 ; U5.7 U5.7@1760,1457.1 ; R5.2 1725.63,1824.37 R6.2 1680,1825 1595,1910 ; R9.2 1819.68,2389.68 C1.1 ; U5.5 U5.5@1860,1457.1 ; U5.3@1960,1495 U5.3 U5.3@1960,1457.1 ; C4.2 C13.1 1928.5,2756.18 1928.5,2673.5 1885,2630 1740,2630 1695,2675 ; 2024.68,2110.32 v4(2075,2060) ; U5.1 2060,1457.1 2022.9,1420 2022.2,1420.69 1996.41,1420.69 U5.3@1960,1457.1 ; VR1.2@2453.11,1365 2515,1365 C9.2@2741.2,1138.8 ; C14.1 R26.2 ; C9.2 C8.2 v4(2820,1210) ; U6.3@2820,3447.22 2732.22,3535 2520,3535 2480,3495 R26.2 ; U6.3@2825,3415 P1.44 P1.43 ; P2.26 1595,2160 1595,1910 ; P2.26 1605,2280 1684.72,2280 U3.8 1710,2354.68 C1.1 ; P2.14 1595.63,2759.37 R22.1 1695,2675 ; P2.14 1540,2825.63 R4.1 1734.37,3044.37 1775,3085 1900,3085 2054.93,3239.93 2054.93,3424.93 R12.1 2285,3430 R31.2 2300,3395 2340,3355 2387.3,3355 2439.71,3407.41 2439.71,3453.68 2461.03,3475 R26.2 ; 1595,1910 1595,1495 1669.31,1420.69 1735.69,1420.69 1760,1445 U5.7@1760,1457.1 ; 1695,2675 1670,2650 1670,2445 1725.32,2389.68 C1.1 ; U5.7@1760,1457.1 1796.41,1420.69 1823.59,1420.69 U5.5@1860,1457.1 ; U5.5@1860,1457.1 1896.41,1420.69 1923.59,1420.69 U5.3@1960,1457.1
  Top Layer w35: U5.1 2180,1365 2216.89,1365 VR1.2@2453.11,1365
  Bottom Layer w30: v4(2075,2060) 2075,2045 2223.5,1896.5 2223.5,1281.5 2403.56,1101.44 2516.44,1101.44 2685,1270 2760,1270 v4(2820,1210) v4@2820,1210.31
VCC5: C6.2 C7.2 P2.1 P2.2 P2.9 P2.10 P2.15 P2.16 P2.23 P2.24 VR1.3 | length 4235.6
  Top Layer w30: P2.1 P2.2
  Top Layer w40: P2.23 P2.24 1615,2390 1615,2640 P2.16 ; v2(2500,1635) 2500,1502.44 VR1.3 2494.45,1455.55 2530,1420 v2(2535,1420) ; v2(2525,1210) 2525,1205 C6.2 C7.2
  Bottom Layer w40: P2.15 P2.16 1575,2715 1625,2765 1625,2910 ; P2.9 P2.10 ; P2.24@1540,2310 P2.24 ; P2.2 1630,3325 1630,3095 1550,3015 P2.10 ; 1625,2920 1625,2910 ; v2(2500,1635) 2500,1695 2453.87,1741.13 2453.87,2356.13 2155,2655 1880,2655 1625,2910 ; v2(2525,1210) 2535,1220 v2(2535,1420) ; P2.10 1540,2995 1625,2910
WATER: R6.1 U1.46 U3.1 | length 619.8
  Top Layer w10: R6.1 1735,1895.63 1735,2025 U3.1 1710,2065 1835,2190 1875,2190 1902.52,2217.52 U1.46
pads on no net: P3.0 U1.8 U1.9 U1.16 U1.17 U1.18 U1.23 U1.30 U1.31 U1.32 U1.33 U1.34 U1.35 U1.36 U1.38 U1.39 U1.40 U1.45 U1.51 U1.52 U1.53 U1.54 U1.55 U1.56 U1.57 U1.58 U1.65 U1.66 U1.67 U1.71 U1.77 U1.78 U1.79 U1.80 U1.83 U1.84 U1.85 U1.86 U1.87 U2.5 U3.5 U3.6 U3.7 U4.5
copper on no net:
  other v3: 1530,1105 3205,1105 1530,3620
  other v5: 3205,3620

## Polygon pours and split planes (outlines as drawn)
GND on Top Layer "1" (solid, pour order 146): 2588.94,1496.22 2590.15,1495 2945,1495 2945,1180 2933.18,1168.18 2591.29,1168.18 2591.29,1488 2588.94,1490.35
GND on Top Layer "1" (solid, pour order 142): 3055,965 3050,970 3050,1200 2600,1200 2610,1210 2610,2480 3350,2480 3350,3625 3350,3665 3330,3685 3270,3745 3260,3745 3235,3770 3230,3765 3175,3765 1525,3765 1515,3755 1485,3755 1465,3755 1435,3725 1395,3685 1395,3680 1395,3670 1385,3660 1385,3605 1385,1115 1385,1075 1385,1055 1410,1030 1450,990 1450,985 1460,985 1470,975 1485,960 1550,960 3050,960
POWER_LED1_VCC on Top Layer "1" (solid, pour order 92): 2950,1255 3350,1255 3350,1465 3150,1465 3150,1670 3155,1675 3350,1675 3350,1865 3345,1860 3150,1860 3150,2065 3350,2065 3350,2270 3345,2265 2945,2265 2925,2265 2925,1790 2975,1790 2980,1785 2980,1255
D_GND on Top Layer "1" (solid, pour order 104): 3150,1663.99 3156.01,1670 3350,1670 3350,1480 3335,1465 3150,1465 3150,1670
D_GND on Top Layer "1" (solid, pour order 132): 2980,1530 2620,1530 2620,1960 2615,1965 2620,1970 2710,1970 2710,2370 2715,2375 2725,2385 2815,2385 2925,2385 2925,1790 2975,1790 2980,1785 2980,1515.06
GND on Bottom Layer "1" (solid, pour order 144): 3060,965 3055,970 3055,1200 2600,1200 2590,1210 2600,1220 2600,2490 3350,2490 3350,3625 3350,3660 3320,3690 3270,3740 3270,3745 3265,3745 3240,3770 3235,3765 1540,3765 1480,3765 1455,3740 1420,3705 1405,3705 1405,3680 1385,3660 1385.09,3659.91 1385.09,3625 1385.09,1105.09 1385,1105 1400,1090 1400,1055 1400,1035 1435,1000 1455,980 1505,980 3060,980 3065,975
POWER_LED2_GND on Bottom Layer "1" (solid, pour order 28): 3350,2270 3115,2270 3115,2140 2820,2140 2820,2467 3348,2467 3350,2465 3350,2270
POWER_LED1_GND on Bottom Layer "1" (solid, pour order 36): 3350,1855 3350,2065 2940,2065 2940,1866.01 2707.8,1866.01 2706.99,1865.21 2705.23,1863.44 2705.23,1531.34 3013.66,1531.34 3014.25,1530.75 3026.01,1542.51 3026.01,1668.99 3143.99,1668.99 3150,1675 3150,1860 3350,1860
D_GND on Bottom Layer "1" (solid, pour order 136): 2815,2385 2810,2390 2705,2390 2705,1980 2700,1975 2695,1970 2615,1970 2615,1260 2620,1255 3150,1255 3150,1465 3145,1470 3150,1465 3350,1465 3350,1665 3340,1675 3026.01,1675 3026.01,1551.03 3009.99,1535.01 3009.81,1535.2 2710,1535.2 2710,1859.98 2710.01,1859.99 2710.02,1860 2940,1860 2940,2145 2935,2150 2925,2140 2820,2140 2815,2145 2815,2390

## Keep-outs
Keep-Out Layer:
  lines w10: 1384.22,1105 ccw(c1529.22,1105) 1529.22,960 3205,960 ccw(c3205,1105) 3350,1105 ; 1385,1105 1385,3625 ; 1385.09,3625 cw(c1530,3620) 1525,3764.91 ; 1525,3765 3200,3765 ; 3205.44,3765.29 cw(c3209.64,3625) 3350,3625 ; 3350,1109.19 3350,3615.47

## Silkscreen, mask and mechanical layers (free items; w line width, h text height)
Top Overlay:
  drawing of 493 lines, arcs and shapes, not listed
  text "PC0" at 2800,3730 h28
  text "Reset" at 2375,3725 h28
  text "5V" at 1600,3405 h28
  text "3.3" at 3070,3405 h28
  text "CAN_L1/2" at 1600,3320 h28
  text "DIO/CLK" at 2950,3300 h28
  text "CAN_H1/2" at 1595,3195 h28
  text "GND" at 3065,3195 h28
  text "GND" at 1605,3100 h28
  text "PE6/PC13" at 2935,3100 h28
  text "ROV2019" at 2675,3075 h28
  text "V1.0" at 2715.06,3038.07 h40
  text "5V" at 1600,3005 h28
  text "PE4/PE5" at 2955,3000 h28
  text "GND" at 1600,2900 h28
  text "PE2/PE3" at 2955,2900 h28
  text "5V" at 1600,2805 h28
  text "PE0/PE1" at 2960,2795 h28
  text "3.3" at 1600,2700 h28
  text "PB8/PB9" at 2960,2700 h28
  text "RX4/5" at 1605,2610 h28
  text "PB6/PB7" at 2955,2600 h28
  text "TX4/5" at 1600,2510 h28
  text "PB4/PB5" at 2955,2495 h28
  text "GND" at 1605,2400 h28
  text "5V" at 1605,2305 h28
  text "LED2-" at 3040,2300 h28
  text "3.3" at 1605,2200 h28
  text "LED2+" at 3035,2200 h28
  text "RX" at 1605,2115 h28
  text "2/3" at 1600,2075 h28
  text "TX" at 1600,2005 h28
  text "2/3" at 1600,1970 h28
  text "GND" at 1595,1900 h28
  text "LED1-" at 3025,1890 h28
  text "LED1+" at 3030,1815 h28
  text "E10/E11" at 1605,1760 h28
  text "E13" at 2375,1745 h28
  text "E12" at 2075,1730 h28
  text "GND/LS+" at 1605,1720 h28
  text "3/4" at 1605,1600 h28
  text "PWM" at 1600,1525 h28
  text "D_GND" at 3005,1520 h28
  text "M1/2" at 1600,1485 h28
  text "PWM" at 1600,1425 h28
  text "5V" at 1600,1380 h28
  text "PWM" at 1600,1315 h28
  text "VBAT" at 3045,1300 h28
  text "GND" at 1605,1280 h28
  text "DIO" at 2760,1250 h28
  text "CLK" at 2820,1250 h28
  text "PWM" at 2395,1075 h28
  text "POWER" at 2855,1000 h28

## Text inside footprints (layer, text, board x,y; h text height)
P1: Top Overlay "1" at 3355,1225 h28 r90
P2: Top Overlay "1" at 1390,3485 h28 r270